# EAGLE board CircuitSchematic v7 (EAGLE 9.7.0)
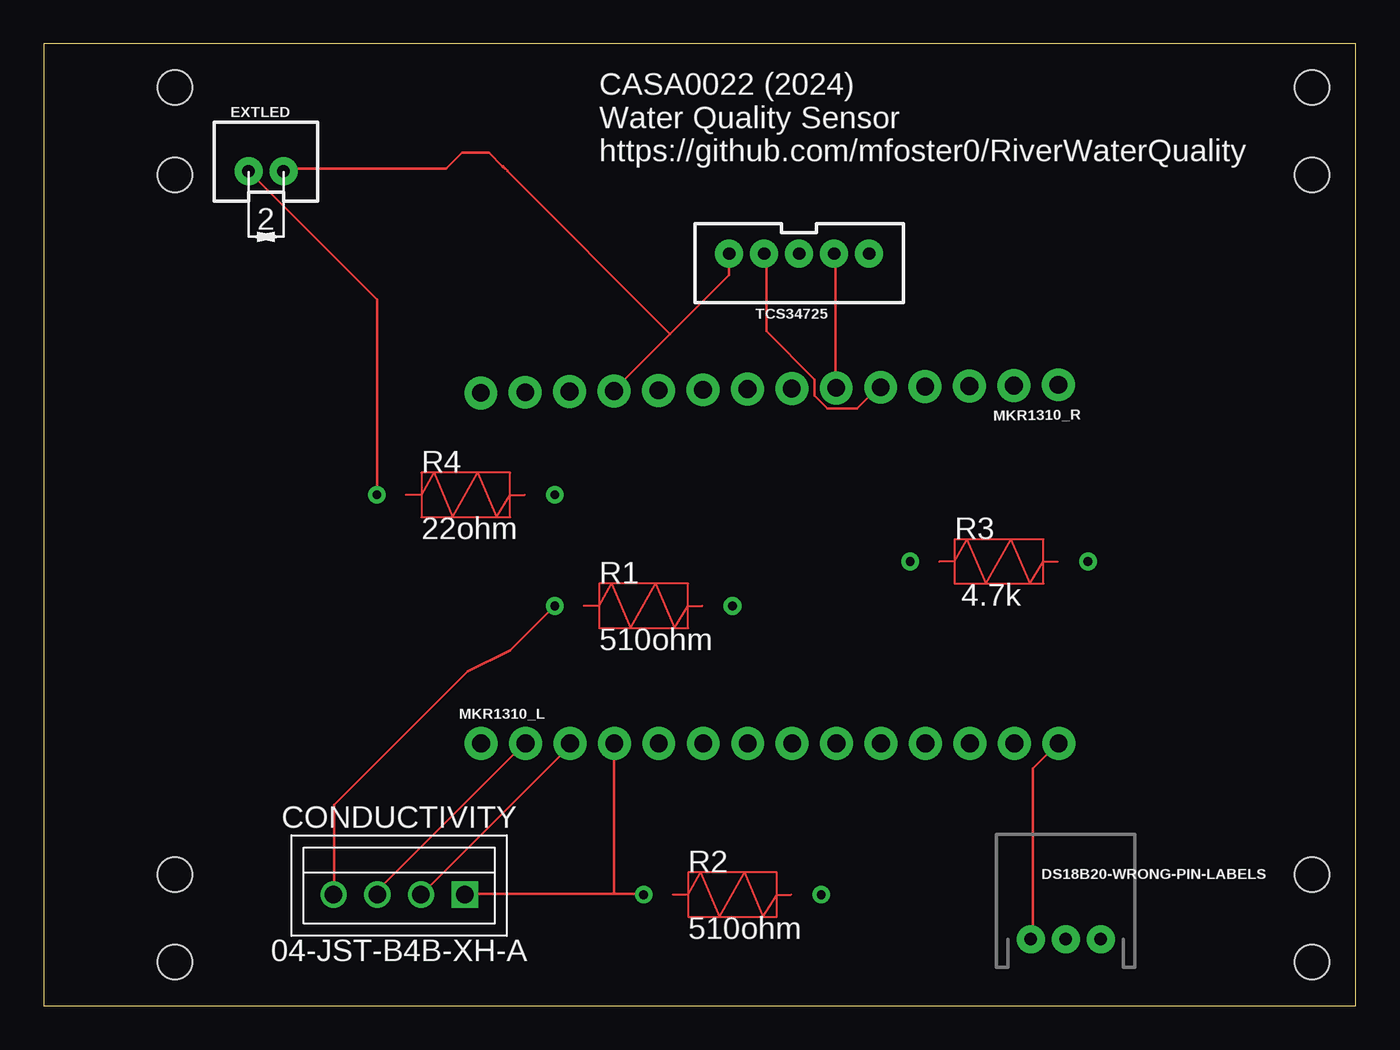
[diagram p0: board, top side]
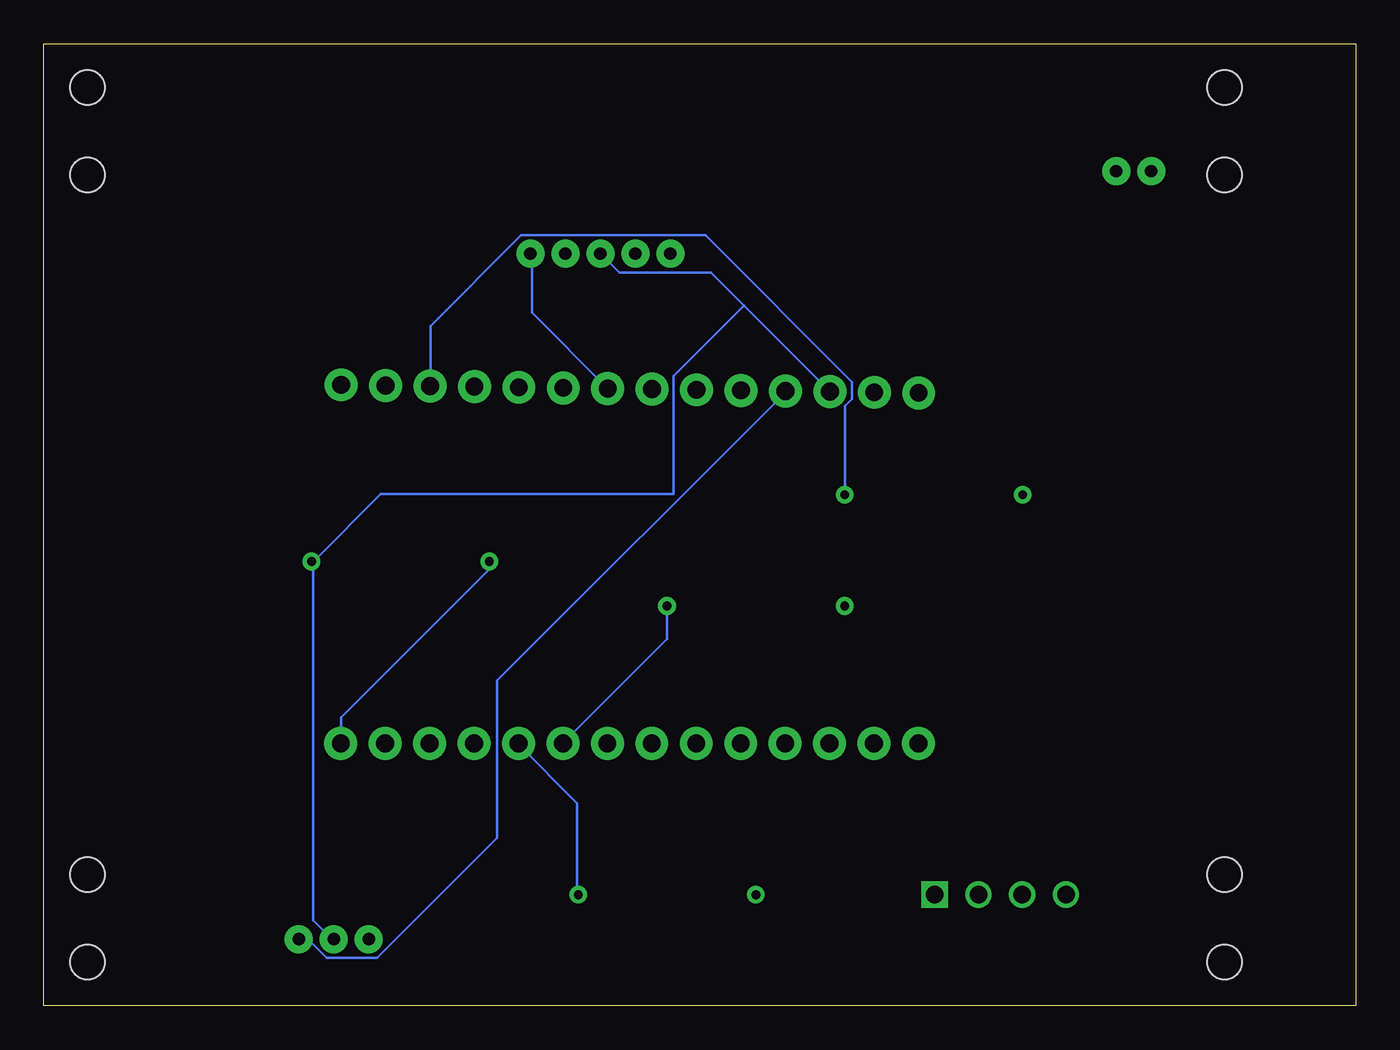
[diagram p1: board, bottom side, seen from below]

Size 75 x 55 mm. Coordinates in mm from the lower left corner, seen from the top.
Outline: 0,0 75,0 75,55 0,55 0,0
Copper layers (1*16): Top / Bottom
Stack-up Default Layer Stack: Top User Defined 0.035mm / Dielectric-1 User Defined 1.5mm / Bottom User Defined 0.035mm
Design rules: minimum copper width 6mil, minimum drill size 0.35mm, copper clearance wire_polygon to wire_polygon 6mil, copper clearance wire_polygon to pad_smd 6mil, copper clearance wire_polygon to via 6mil, copper clearance pad_smd to pad_smd 6mil, copper clearance pad_smd to via 6mil, copper clearance via to via 6mil, copper clearance smd to pad (same net) 6mil, copper clearance smd to via (same net) 6mil, copper clearance smd to smd (same net) 6mil, dimension clearance 40mil, via restrict clearance 0mil, restrict clearance 0mil, drill distance 6mil, keepout clearance 0mil
Holes 2 mm at 7.5,52.5 7.5,47.5 72.5,52.5 7.5,7.5 7.5,2.5 72.5,7.5 72.5,2.5 72.5,47.5

## Footprints (pad centres in the part's own frame; a part is rotated, then mirrored left to right if it is on the bottom)
B4B-XH = drill 1 square: P$1 3.75,0 | drill 1: P$2 1.25,0; P$3 -1.25,0; P$4 -3.75,0
JST-3-PTH-NS = drill 0.7 pad 1.6: 1 -2,0; 2 0,0; 3 2,0
JST-2-PTH-VERT = drill 0.7 pad 1.6: 1 -1,-0.55; 2 1,-0.55
1X14_NO_SILK = drill 1.016 pad 1.88: 1 0,0; 2 2.54,0; 3 5.08,0; 4 7.62,0; 5 10.16,0; 6 12.7,0; 7 15.24,0; 8 17.78,0; 9 20.32,0; 10 22.86,0; 11 25.4,0; 12 27.94,0; 13 30.48,0; 14 33.02,0
GENERIC_RESISTOR = drill 0.5: P$1 -5.08,0; P$2 5.08,0
JST-5-PTH-VERT = drill 0.7 pad 1.6: 1 -4,0.18; 2 -2,0.18; 3 0,0.18; 4 2,0.18; 5 4,0.18

## Placement (x,y rotation side)
CONDUCTIVITY  04-JST-B4B-XH-A  [B4B-XH]  20.32,6.35 0 top
DS18B20-WRONG-PIN-LABELS  [JST-3-PTH-NS]  58.42,3.81 0 top
EXTLED  [JST-2-PTH-VERT]  12.7,48.26 0 top
MKR1310_L  [1X14_NO_SILK]  25,15 0 top
MKR1310_R  [1X14_NO_SILK]  58,35.5 180.8 top
R1  510ohm  [GENERIC_RESISTOR]  34.29,22.86 0 top
R2  510ohm  [GENERIC_RESISTOR]  39.37,6.35 0 top
R3  4.7k  [GENERIC_RESISTOR]  54.61,25.4 0 top
R4  22ohm  [GENERIC_RESISTOR]  24.13,29.21 0 top
TCS34725  [JST-5-PTH-VERT]  43.18,43.18 180 top

## Library data of the parts
CONDUCTIVITY = bt_con-jst-xh
DS18B20-WRONG-PIN-LABELS MKR1310_L MKR1310_R TCS34725 = SparkFun-Connectors
EXTLED = SparkFun-Retired; PROD_ID: CONN-12097
R1-R4 = ComponentLibrary

## Nets
N$2: EXTLED.1 R4.P$1
N$3: MKR1310_L.10 R2.P$2
N$4: DS18B20-WRONG-PIN-LABELS.2 MKR1310_R.12 R3.P$2 TCS34725.3
N$5: DS18B20-WRONG-PIN-LABELS.3 EXTLED.2 MKR1310_R.11 TCS34725.5
N$6: MKR1310_R.3 R4.P$2
N$7: MKR1310_R.5 TCS34725.4
N$8: MKR1310_R.6 TCS34725.2
N$9: MKR1310_R.7 TCS34725.1
N$11: CONDUCTIVITY.P$1 MKR1310_L.4 R2.P$1
N$12: MKR1310_L.9 R1.P$2
N$13: CONDUCTIVITY.P$4 R1.P$1
N$14: CONDUCTIVITY.P$2 MKR1310_L.3
N$15: CONDUCTIVITY.P$3 MKR1310_L.2
N$16: DS18B20-WRONG-PIN-LABELS.1 MKR1310_L.14 R3.P$1

## Tracks (layer width: path | path; a pad name or v marks a point on that pad's centre or on a via)
N$2
  Top 0.152: R4.P$1 19.05,40.36 EXTLED.1
N$3
  Bottom 0.152: R2.P$2 44.5,6.4 44.5,11.58 47.85,14.94 MKR1310_L.10
N$4
  Top 0.152: 30.25,35 MKR1310_R.12
  Bottom 0.152: R3.P$2 59.59,25.3 59.59,4.88 58.52,3.81 DS18B20-WRONG-PIN-LABELS.2 | 59.59,25.45 R3.P$2 | MKR1310_R.12 34.98,40.02 | 34.98,40.02 36.86,41.91 42.09,41.91 TCS34725.3 | 34.98,40.02 35,40 39,36 39,29.25 55.75,29.25 59.5,25.5 R3.P$2
N$5
  Top 0.152: 26.36,47.85 26.23,47.98 | 26.23,47.98 25.45,48.77 23.93,48.77 23.01,47.85 13.72,47.85 EXTLED.2 | 35.81,38.41 32.61,35.2 MKR1310_R.11 | 35.81,38.41 39.17,41.76 39.17,42.98 TCS34725.5 | 35.81,38.41 26.52,47.7 26.5,47.75 26.25,48 26.23,47.98
  Bottom 0.152: DS18B20-WRONG-PIN-LABELS.3 59.89,3.81 58.83,2.74 55.93,2.74 49.07,9.6 49.07,18.59 32.61,35.05 MKR1310_R.11
N$6
  Bottom 0.152: R4.P$2 29.21,34.29 28.8,34.7 28.8,35.66 37.19,44.04 47.7,44.04 52.88,38.86 52.88,35.51 MKR1310_R.3
N$7
  Top 0.152: TCS34725.4 41.3,42.98 41.3,38.56 44.04,35.81 44.04,34.9 44.81,34.14 46.48,34.14 47.7,35.36 MKR1310_R.5
N$8
  Top 0.152: TCS34725.2 45.26,42.98 45.26,35.36 MKR1310_R.6
N$9
  Bottom 0.152: TCS34725.1 47.09,42.98 47.09,39.62 42.82,35.36 MKR1310_R.7
N$11
  Top 0.152: 32.61,6.4 34.29,6.4 R2.P$1 | 32.61,6.4 24.08,6.4 CONDUCTIVITY.P$1 | 32.61,6.4 32.61,14.94 MKR1310_L.4
N$12
  Bottom 0.152: R1.P$2 39.37,20.98 45.26,15.09 MKR1310_L.9
N$13
  Top 0.152: CONDUCTIVITY.P$4 16.61,6.4 16.61,11.48 24.23,19.1 26.67,20.32 R1.P$1
N$14
  Top 0.152: CONDUCTIVITY.P$2 21.64,6.4 30.18,14.94 MKR1310_L.3
N$15
  Top 0.152: CONDUCTIVITY.P$3 19.2,6.4 19.2,6.71 27.43,14.94 MKR1310_L.2
N$16
  Top 0.152: DS18B20-WRONG-PIN-LABELS.1 56.54,3.81 56.54,13.56 57.91,14.94 MKR1310_L.14 57.91,15.09
  Bottom 0.152: R3.P$1 49.5,25 58,16.5 58,15 MKR1310_L.14

## Text on the board
SilkscreenTop: CASA0022 (2024) / Water Quality Sensor / https://github.com/mfoster0/RiverWaterQuality